# EAGLE board F20_NoMCU_PDM_V1_v1 (EAGLE 9.7.0)
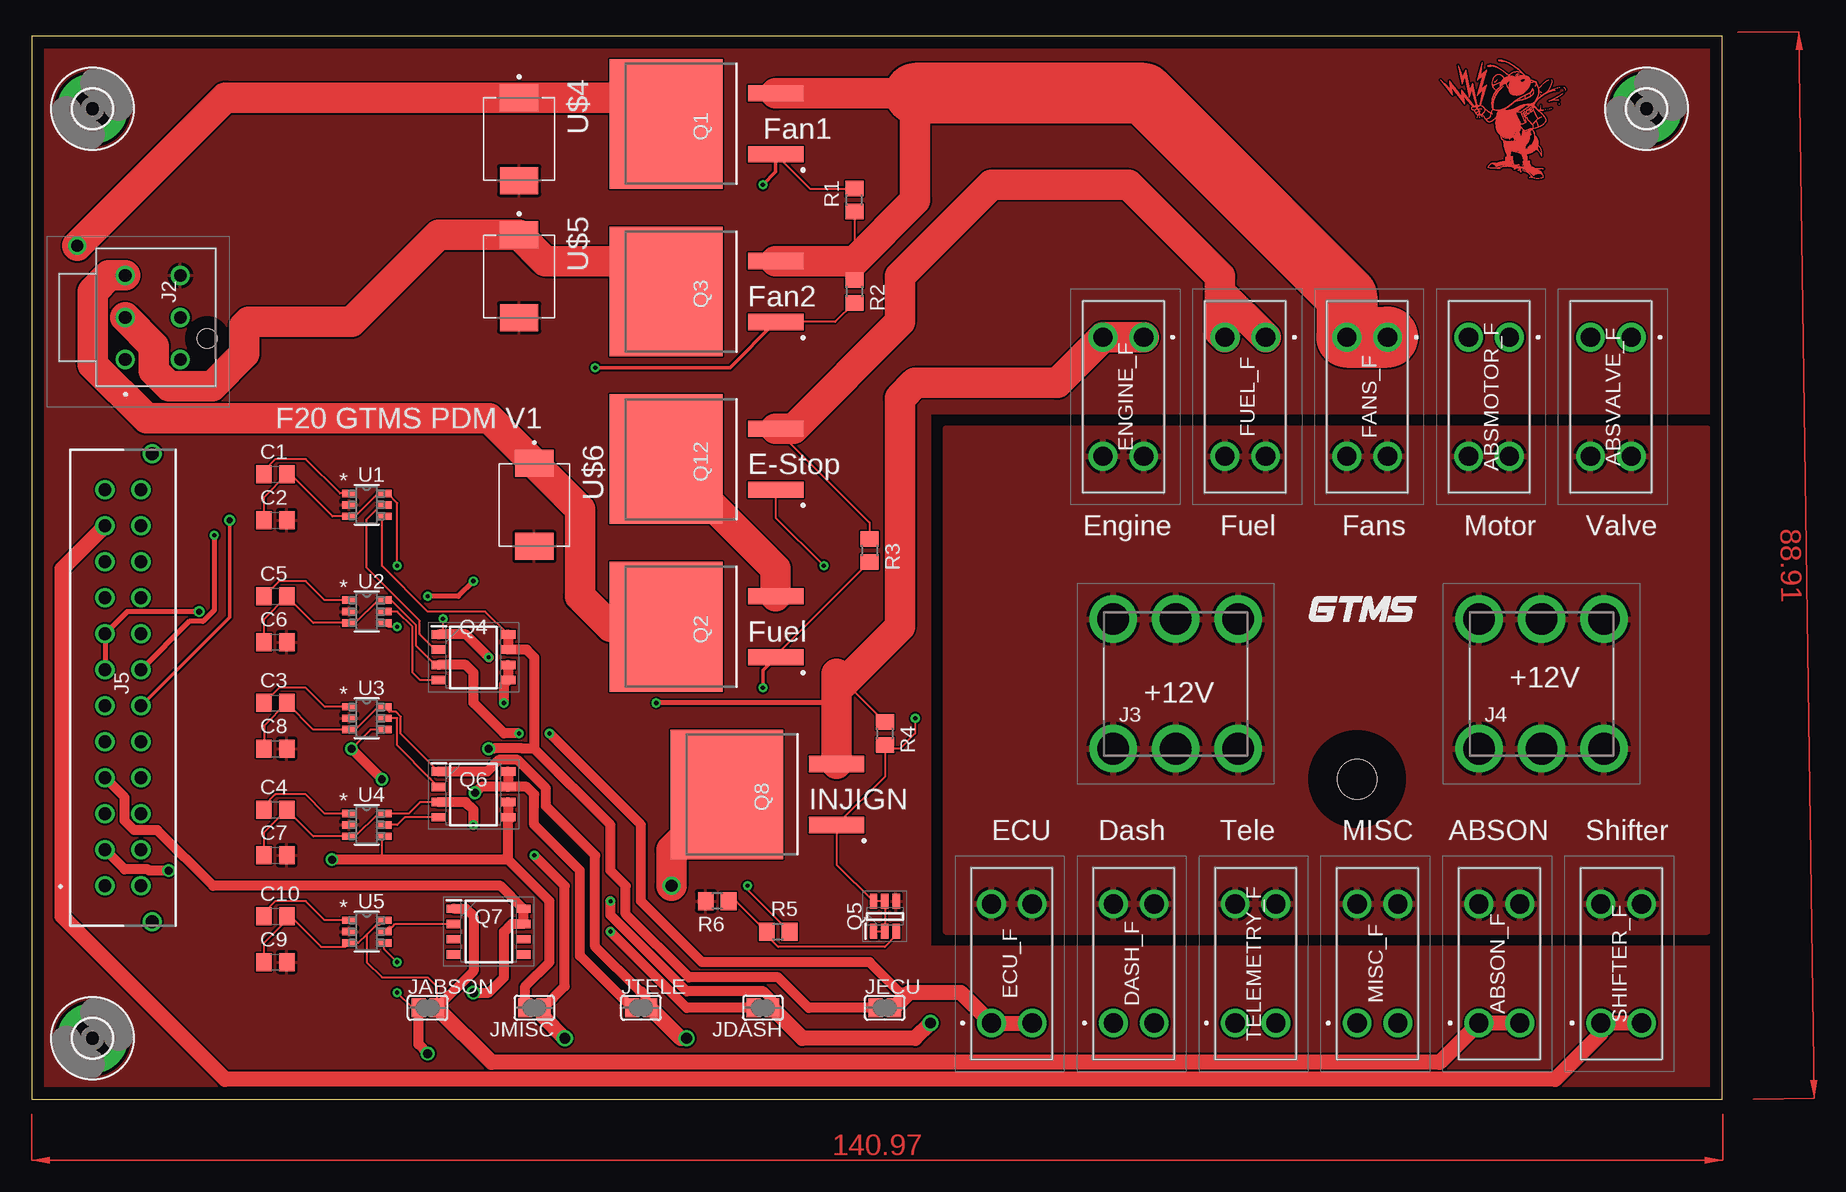
[diagram p0: board, top side]
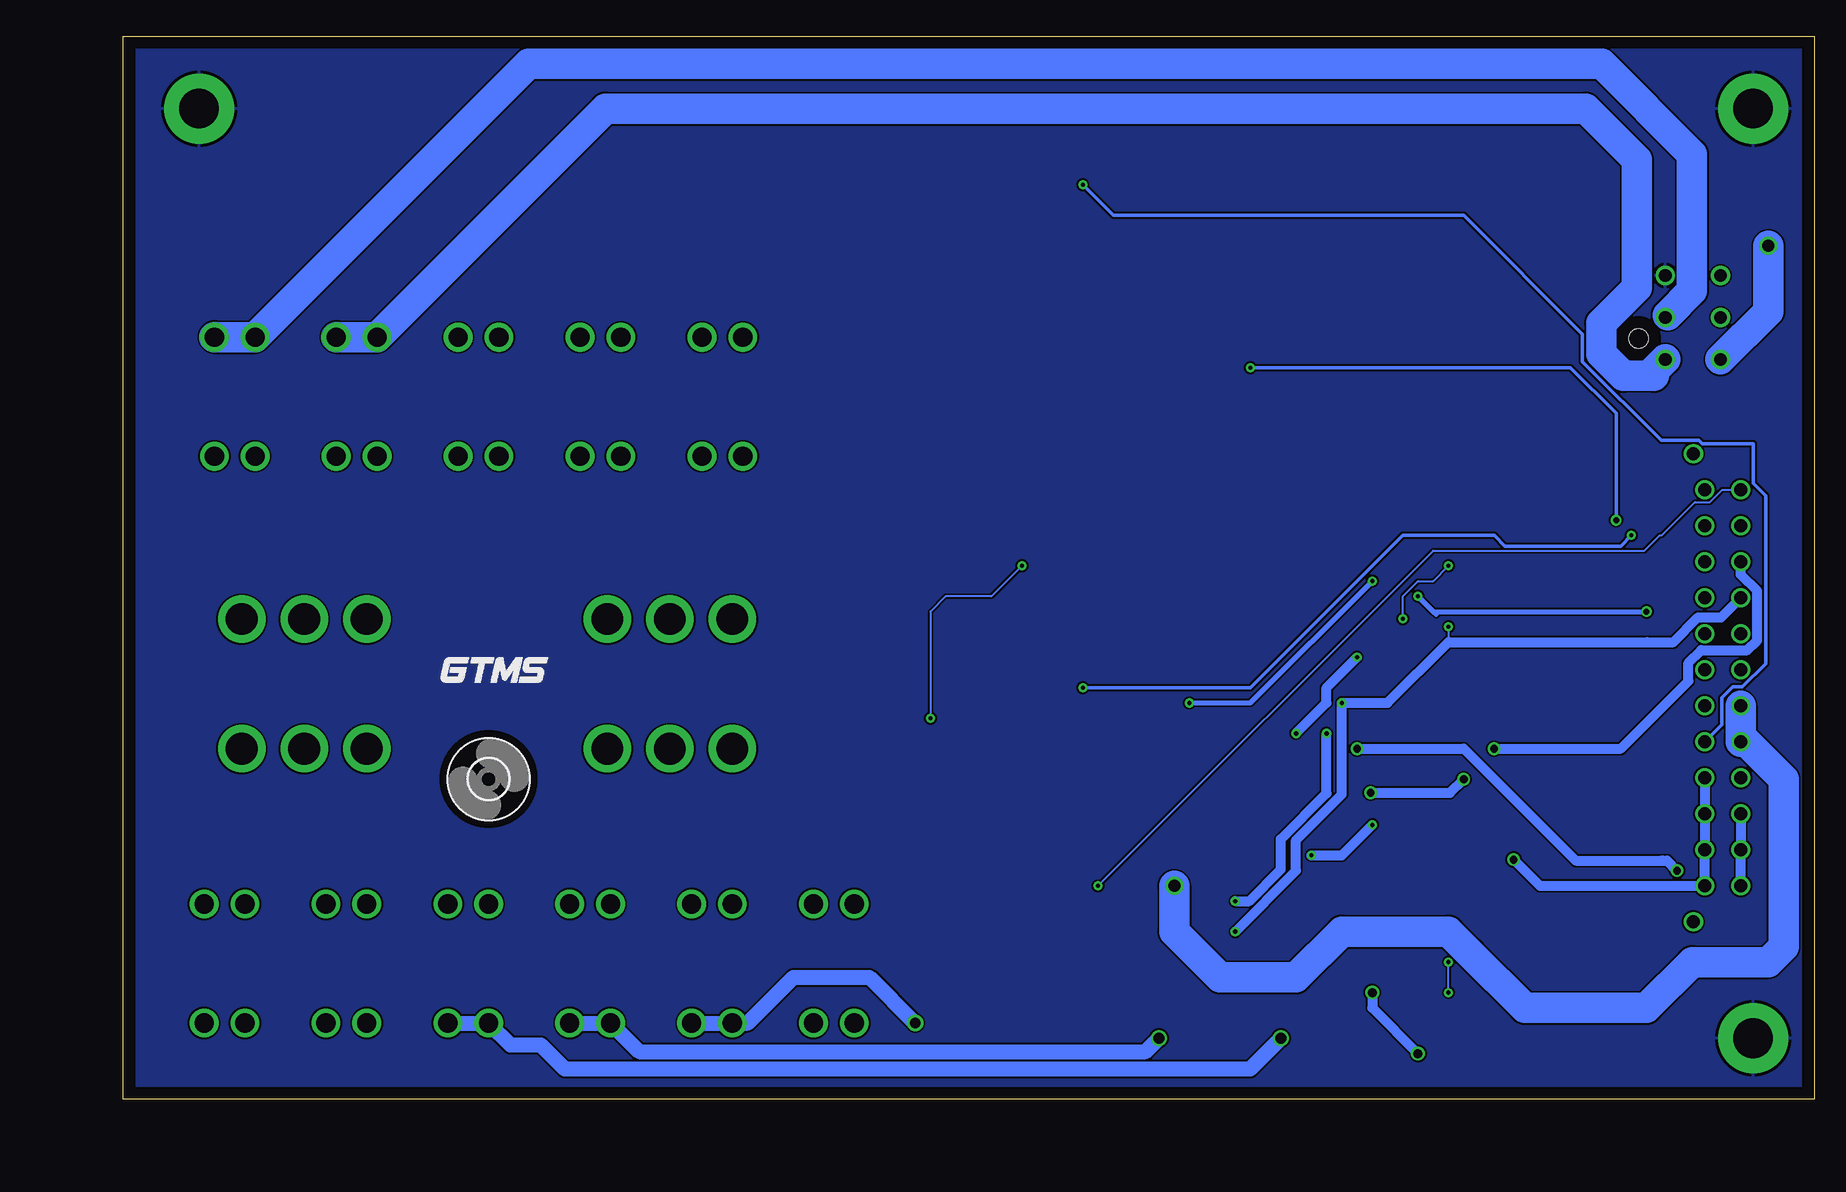
[diagram p1: board, bottom side, seen from below]

Size 140.95 x 88.57 mm. Coordinates in mm from the lower left corner, seen from the top.
Outline: 0,0 140.95,0 140.95,88.57 0,88.57 0,0
Copper layers (1*16): Top 0.035mm / dielectric 1.5mm / Bottom 0.035mm
Design rules "default": minimum track width 6mil, minimum drill 0.35mm, track to track 6mil, track to pad 6mil, pad to pad 6mil, via to via 6mil, smd to smd 6mil, copper to edge 40mil, drill to drill 6mil, minimum pad ring 10mil, minimum via ring 8mil, stop-mask expansion 4mil, vias tented up to drill 0mil, thermal gap 10mil

## Footprints (pad centres in the part's own frame; a part is rotated, then mirrored left to right if it is on the bottom)
3568 = drill 1.6 pad 2.4: 1 0,0; 2 0,-3.4; 3 9.92,0; 4 9.92,-3.4
C0805 = smd 1.3 x 1.5: 1 -0.95,0; 2 0.95,0
3,3-PAD = drill 3.3 pad 5.842: B3,3 0,0
3,3 = hole 3.3: 0,0
1722981106 = drill 1.06 pad 1.59: 1 -3.125,1.085; 2 0.375,1.085; 3 3.875,1.085; 4 -3.125,-3.515; 5 0.375,-3.515; 6 3.875,-3.515 | hole 1.64: -1.375,-5.745
8196 = drill 2.64 pad 3.96: 1 0,0; 2 0,10.8; 3 5.21,0; 4 5.21,10.8; 5 10.42,0; 6 10.42,10.8
43045-2412 = drill 1.07 pad 1.6: 1 16.5,-1.5; 2 13.5,-1.5; 3 10.5,-1.5; 4 7.5,-1.5; 5 4.5,-1.5; 6 1.5,-1.5; 7 -1.5,-1.5; 8 -4.5,-1.5; 9 -7.5,-1.5; 10 -10.5,-1.5; 11 -13.5,-1.5; 12 -16.5,-1.5; 13 16.5,1.5; 14 13.5,1.5; 15 10.5,1.5; 16 7.5,1.5; 17 4.5,1.5; 18 1.5,1.5; 19 -1.5,1.5; 20 -4.5,1.5; 21 -7.5,1.5; 22 -10.5,1.5; 23 -13.5,1.5; 24 -16.5,1.5; 25 -19.5,2.44; 26 19.5,2.44
SJ = smd 1.168 x 1.6: 1 -0.762,0; 2 0.762,0
PG-TO263-3-2_1 = smd 1.35 x 4.6: 1 -2.54,-12.5; 2 2.54,-12.5 | smd 10.8 x 9.4: 3 0,-3.35
SOIC127P605X105-8N = smd 1.212 x 0.7: 1 -2.894,1.905; 2 -2.894,0.635; 3 -2.894,-0.635; 4 -2.894,-1.905; 5 2.894,-1.905; 6 2.894,-0.635; 7 2.894,0.635; 8 2.894,1.905
SOT95P275X110-6N = smd 1.25 x 0.6: 1 -1.25,0.95; 2 -1.25,0; 3 -1.25,-0.95; 4 1.25,-0.95; 5 1.25,0; 6 1.25,0.95
R0805 = smd 1.3 x 1.5: 1 -0.95,0; 2 0.95,0
DBV6-M = smd 1.181 x 0.61: 1 -1.467,0.95; 2 -1.467,0; 3 -1.467,-0.95; 4 1.467,-0.95; 5 1.467,0; 6 1.467,0.95
DIOM7959X265N = smd 2.25 x 3.18: A 3.455,0; C -3.455,0

## Placement (x,y rotation side)
ABSMOTOR_F  3568  [3568]  123.19,63.5 270 top
ABSON_F  3568  [3568]  120.65,6.35 90 top
ABSVALVE_F  3568  [3568]  133.35,63.5 270 top
C1  1u  [C0805]  20.32,52.07 0 top
C2  10u 25V  [C0805]  20.32,48.26 0 top
C3  1u  [C0805]  20.32,33.02 0 top
C4  1u  [C0805]  20.32,24.13 0 top
C5  1u  [C0805]  20.32,41.91 0 top
C6  10u 25V  [C0805]  20.32,38.1 0 top
C7  10u 25V  [C0805]  20.32,20.32 0 top
C8  10u 25V  [C0805]  20.32,29.21 0 top
C9  10u 25V  [C0805]  20.32,11.43 0 top
C10  1u  [C0805]  20.32,15.24 0 top
DASH_F  3568  [3568]  90.17,6.35 90 top
ECU_F  3568  [3568]  80.01,6.35 90 top
ENGINE_F  3568  [3568]  92.71,63.5 270 top
FANS_F  3568  [3568]  113.03,63.5 270 top
FUEL_F  3568  [3568]  102.87,63.5 270 top
H1  MOUNT-PAD-ROUND3.3  [3,3-PAD]  5.08,5.08 0 top
H2  MOUNT-PAD-ROUND3.3  [3,3-PAD]  134.62,82.55 0 top
H3  MOUNT-PAD-ROUND3.3  [3,3-PAD]  5.08,82.55 0 top
H4  MOUNT-HOLE3.3  [3,3]  110.49,26.67 0 bottom
J2  1722981106  [1722981106]  8.89,64.77 90 top
J3  8196  [8196]  90.17,29.21 0 top
J4  8196  [8196]  120.65,29.21 0 top
J5  43045-2412  [43045-2412]  7.62,34.29 270 top
JABSON  [SJ]  33.02,7.62 0 top
JDASH  [SJ]  60.96,7.62 180 top
JECU  [SJ]  71.12,7.62 0 top
JMISC  [SJ]  41.91,7.62 180 top
JTELE  [SJ]  50.8,7.62 0 top
MISC_F  3568  [3568]  110.49,6.35 90 top
Q1  IPB120P04P4L03ATMA1  [PG-TO263-3-2_1]  49.53,81.28 90 top
Q2  IPB120P04P4L03ATMA1  [PG-TO263-3-2_1]  49.53,39.37 90 top
Q3  IPB120P04P4L03ATMA1  [PG-TO263-3-2_1]  49.53,67.31 90 top
Q4  BUK9K29-100E  [SOIC127P605X105-8N]  36.83,36.83 0 top
Q5  NSVT489AMT1G  [SOT95P275X110-6N]  71.12,15.24 90 top
Q6  BUK9K29-100E  [SOIC127P605X105-8N]  36.83,25.4 0 top
Q7  BUK9K29-100E  [SOIC127P605X105-8N]  38.1,13.97 0 top
Q8  IPB120P04P4L03ATMA1  [PG-TO263-3-2_1]  54.61,25.4 90 top
Q12  IPB120P04P4L03ATMA1  [PG-TO263-3-2_1]  49.53,53.34 90 top
R1  1k  [R0805]  68.58,74.93 90 top
R2  1k  [R0805]  68.58,67.31 270 top
R3  1k  [R0805]  69.85,45.72 270 top
R4  1k  [R0805]  71.12,30.48 270 top
R5  20k  [R0805]  62.23,13.97 0 top
R6  1k  [R0805]  57.15,16.51 180 top
SHIFTER_F  3568  [3568]  130.81,6.35 90 top
TELEMETRY_F  3568  [3568]  100.33,6.35 90 top
U1  LM74700QDBVTQ1DBV6-M  [DBV6-M]  27.94,49.53 0 top
U2  LM74700QDBVTQ1DBV6-M  [DBV6-M]  27.94,40.64 0 top
U3  LM74700QDBVTQ1DBV6-M  [DBV6-M]  27.94,31.75 0 top
U4  LM74700QDBVTQ1DBV6-M  [DBV6-M]  27.94,22.86 0 top
U5  LM74700QDBVTQ1DBV6-M  [DBV6-M]  27.94,13.97 0 top
U$1  GTMS  [GTMS]  110.49,40.64 0 top
U$2  ECE_BUZZ  [ECE_BUZZ]  123.19,81.28 0 top
U$3  GTMS  [GTMS]  110.49,35.56 0 bottom
U$4  S10AL-TP  [DIOM7959X265N]  40.64,80.01 270 top
U$5  S10AL-TP  [DIOM7959X265N]  40.64,68.58 270 top
U$6  S10AL-TP  [DIOM7959X265N]  41.91,49.53 270 top

## Library data of the parts
ABSMOTOR_F ABSON_F ABSVALVE_F DASH_F ECU_F ENGINE_F FANS_F FUEL_F MISC_F SHIFTER_F TELEMETRY_F = SamacSys_Parts; DESCRIPTION: Fuse Holder .63 MINI FUSE HOLDER; HEIGHT: 7.37mm; MANUFACTURER_NAME: Keystone Electronics; MANUFACTURER_PART_NUMBER: 3568; MOUSER_PART_NUMBER: 534-3568; MOUSER_PRICE-STOCK: https://www.mouser.com/Search/Refine.aspx?Keyword=534-3568
C1-C10 = rcl; SPICEPREFIX: C
H1-H4 = holes
J2 = Molex_1722981106; DESCRIPTION: ULTRAFIT CONN HDR 06CKT; HEIGHT: 14mm; MANUFACTURER_NAME: Molex; MANUFACTURER_PART_NUMBER: 1722981106
J3 J4 = 8196_ScrewTerminal; DESCRIPTION: Terminal; 10-32; Stainless Steel; 3/8 in.; 0.679 in.; 0.679 in.; Brass; Tin; HEIGHT: 11.51mm; MANUFACTURER_NAME: Keystone Electronics; MANUFACTURER_PART_NUMBER: 8196; MOUSER_PART_NUMBER: 534-8196; MOUSER_PRICE-STOCK: https://www.mouser.com/Search/Refine.aspx?Keyword=534-8196
J5 = Molex_0430452412; DESCRIPTION: Header 3.00mm, WTB, dual row, vert,24w Molex MICRO-FIT 3.0 Series, Series Number 43045, 3mm Pitch 24 Way 2 Row Shrouded Straight PCB Header, Through Hole; HEIGHT: mm; MANUFACTURER_NAME: Molex; MANUFACTURER_PART_NUMBER: 43045-2412; MOUSER_PART_NUMBER: 538-43045-2412; MOUSER_PRICE-STOCK: https://www.mouser.com/Search/Refine.aspx?Keyword=538-43045-2412
JABSON JDASH JECU JMISC JTELE = jumper
Q1-Q3 Q8 Q12 = IPB120P04P4L03ATMA1; DESCRIPTION: IPB120P04P4L03ATMA1 P-Channel MOSFET, 120 A, 40 V OptiMOS P, 3-Pin D2PAK Infineon; HEIGHT: mm; MANUFACTURER_NAME: Infineon; MANUFACTURER_PART_NUMBER: IPB120P04P4L03ATMA1; MOUSER_PART_NUMBER: 726-IPB120P04P4L03AT; MOUSER_PRICE-STOCK: https://www.mouser.com/Search/Refine.aspx?Keyword=726-IPB120P04P4L03AT
Q4 Q6 Q7 = BUK9K29-100E; DESCRIPTION: NPN/PNP high power double bipolar transistor in a SOT1205 (LFPAK56D) Surface Mounted Device (SMD) power plastic package; HEIGHT: 1.05mm; MANUFACTURER_NAME: Nexperia; MANUFACTURER_PART_NUMBER: PHPT610030NPKX; MOUSER2_PART_NUMBER: 771-PHPT610030NPKX; MOUSER2_PRICE-STOCK: https://www.mouser.com/Search/Refine.aspx?Keyword=771-PHPT610030NPKX
Q5 = NSVT489AMT1G; DESCRIPTION: NPN Bipolar Transistor, 2 A 30 V, 6-pin TSOP; HEIGHT: 1.1mm; MANUFACTURER_NAME: ON Semiconductor; MANUFACTURER_PART_NUMBER: NSVT489AMT1G; MOUSER_PART_NUMBER: 863-NSVT489AMT1G; MOUSER_PRICE-STOCK: https://www.mouser.com/Search/Refine.aspx?Keyword=863-NSVT489AMT1G
R1-R6 = rcl; SPICEPREFIX: R
U1-U5 = LM74700; COPYRIGHT: Copyright (C) 2016 Accelerated Designs. All rights reserved; MANUFACTURER_PART_NUMBER: LM74700QDBVTQ1; VENDOR: Texas Instruments
U$1-U$3 = art
U$4-U$6 = S10AL-TP

## Nets
+12V: ABSMOTOR_F.3 ABSMOTOR_F.4 ABSON_F.3 ABSON_F.4 ABSVALVE_F.3 ABSVALVE_F.4 DASH_F.3 DASH_F.4 ECU_F.3 ECU_F.4 ENGINE_F.3 ENGINE_F.4 FANS_F.3 FANS_F.4 FUEL_F.3 FUEL_F.4 J3.1 J3.2 J3.3 J3.4 J3.5 J3.6 J4.1 J4.2 J4.3 J4.4 J4.5 J4.6 MISC_F.3 MISC_F.4 SHIFTER_F.3 SHIFTER_F.4 TELEMETRY_F.3 TELEMETRY_F.4
ABSMOTOR_F: ABSMOTOR_F.1 ABSMOTOR_F.2 J2.4
ABSON+: J5.4 JABSON.1 Q7.7 Q7.8 U5.4
ABSVALVE_F: ABSVALVE_F.1 ABSVALVE_F.2 J2.5
DASH+: J5.9 JDASH.2 Q4.5 Q4.6 U2.4
ECU+: J5.1 J5.2 J5.3 JECU.1 Q4.7 Q4.8 U1.4
ENGINE_F: ENGINE_F.1 ENGINE_F.2 J5.7 J5.8 Q8.2 R4.1
ESTOP_IN: J5.12 R5.2
FAN1+: J2.1 Q1.3 U$4.C
FAN1SIG: J5.17 Q1.1 R1.2
FAN2+: J2.2 Q3.3 U$5.C
FAN2SIG: J5.18 Q3.1 R2.2
FUEL+: J2.3 Q2.3 U$6.C
FUELSIG: J5.19 Q2.1 R3.2
GND: C2.2 C6.2 C7.2 C8.2 C9.2 H1.B3,3 H2.B3,3 H3.B3,3 J2.6 Q5.4 R6.2 U1.2 U2.2 U3.2 U4.2 U5.2 U$4.A U$5.A U$6.A
INJIGN+: J5.5 J5.6 Q8.3
MISC+: J5.13 J5.14 J5.15 J5.16 JMISC.2 Q6.5 Q6.6 U4.4
N$1: FANS_F.1 FANS_F.2 Q1.2 Q3.2 R1.1 R2.1
N$2: FUEL_F.1 FUEL_F.2 Q12.2 R3.1
N$3: Q2.2 Q12.3
N$4: C1.2 C2.1 ECU_F.1 ECU_F.2 JECU.2 Q4.1 U1.3 U1.6
N$5: Q5.3 R5.1 R6.1
N$6: C1.1 U1.1
N$7: Q5.1 Q5.2 Q5.5 Q5.6 Q8.1 Q12.1 R4.2
N$8: C5.1 U2.1
N$9: C5.2 C6.1 DASH_F.1 DASH_F.2 JDASH.1 Q4.3 U2.3 U2.6
N$11: ABSON_F.1 ABSON_F.2 C9.1 C10.2 JABSON.2 Q7.1 U5.3 U5.6
N$12: Q4.2 U1.5
N$14: C10.1 U5.1
N$15: Q4.4 U2.5
N$16: C3.1 U3.1
N$19: C4.1 U4.1
N$20: Q7.2 U5.5
N$22: C4.2 C7.1 JMISC.1 MISC_F.1 MISC_F.2 Q6.3 U4.3 U4.6
N$23: C3.2 C8.1 JTELE.2 Q6.1 TELEMETRY_F.1 TELEMETRY_F.2 U3.3 U3.6
N$28: Q6.2 U3.5
N$30: Q6.4 U4.5
SHIFTER_F: J5.11 SHIFTER_F.1 SHIFTER_F.2
TELE+: J5.10 JTELE.1 Q6.7 Q6.8 U3.4

## Tracks (layer width: path | path; a pad name or v marks a point on that pad's centre or on a via)
+12V
  pour Top: 76.2,13.97 139.7,13.97 139.7,55.88 76.2,55.88
ABSMOTOR_F
  Bottom 2.54: ABSMOTOR_F.1 ABSMOTOR_F.2 100.74,82.55 19.05,82.55 14.78,78.28 14.78,67.64 17.74,64.68 17.74,62.11 15.92,60.29 13.35,60.29 13.35,60.7 J2.4
ABSON+  (via drill 0.35, 0.75)
  Top 0.152: JABSON.1 31.75,7.62 v30.48,8.89 | v30.48,11.43 29.41,12.5 U5.4
  Top 0.813: v33.02,3.81 32.26,4.57 JABSON.1 | v36.83,8.89 38.1,8.89 39.37,10.16 39.37,13.97 40.01,14.61 Q7.7 Q7.8 39.09,17.78 15.13,17.78 10.48,22.43 8.56,22.43 7.76,23.23 7.76,25.15 J5.4
  Bottom 0.152: v30.48,8.89 v30.48,11.43
  Bottom 0.813: v36.83,8.89 36.83,7.62 v33.02,3.81
ABSVALVE_F
  Bottom 1.016: 12.2,65.35 J2.5
  Bottom 2.54: ABSVALVE_F.1 ABSVALVE_F.2 107.17,86.28 17.7,86.28 10.19,78.77 10.19,67.36 12.2,65.35
DASH+  (via drill 0.35)
  Top 0.152: U2.4 29.73,39.37 v30.48,39.37
  Top 0.813: JDASH.2 54.61,7.62 v48.26,13.97 | v39.37,33.02 39.37,34.57 Q4.5 Q4.6
  Bottom 0.152: v30.48,39.37 30.48,38.1
  Bottom 0.813: v48.26,13.97 43.18,19.05 43.18,21.59 39.37,25.4 v39.37,33.02 35.56,33.02 30.48,38.1 13.95,38.1 11.73,38.1 9.68,40.15 7.76,40.15 J5.9
ECU+  (via drill 0.65)
  Top 0.152: Q4.8 37.82,40.64 33.02,40.64 29.21,44.45 29.21,48.38 U1.4
  Top 0.813: JECU.1 64.77,7.62 62.23,10.16 54.8,10.16 49.53,15.43 49.53,17.78 48.26,19.05 48.26,22.86 41.91,29.21 | 41.91,29.21 41.91,36.83 41.27,37.47 Q4.7 Q4.8 | 41.91,29.21 40.93,29.21 40.91,29.23 38.54,29.23 38.52,29.21 v38.1,29.21 | v11.43,19.05 9.79,19.05 9.68,19.15 7.76,19.15 J5.2
  Bottom 0.813: v38.1,29.21 29.21,29.21 19.88,19.88 12.7,19.88 12.6,19.88 12.26,19.88 v11.43,19.05 | J5.1 J5.2 J5.3
ENGINE_F  (via drill 0.35, 0.5)
  Top 0.152: R4.1 67.11,35.44
  Top 0.406: 67.11,34.09 66.04,33.02 v52.07,33.02 | v36.83,43.18 35.56,41.91 v33.02,41.91 | v13.97,40.64 9.61,40.64 9.6,40.63 7.96,40.63 J5.8 J5.7
  Top 2.54: ENGINE_F.1 ENGINE_F.2 85.5,59.69 73.66,59.69 72.39,58.42 72.39,39.37 67.11,34.09 | 67.11,35.44 67.11,34.09 | 67.11,34.09 Q8.2
  Bottom 0.406: v52.07,33.02 46.99,33.02 v36.83,43.18 | v33.02,41.91 31.75,40.64 | 31.75,40.64 31.51,40.4 | 31.75,40.64 v13.97,40.64
ESTOP_IN  (via drill 0.35)
  Top 0.152: R5.2 59.69,17.46 v59.69,17.78
  Bottom 0.152: v59.69,17.78 31.75,45.72 14.14,45.72 14.05,45.8 13.59,46.27 12.87,46.99 12.7,46.99 9.93,49.76 8.69,49.76 7.66,50.79 J5.12
FAN1+  (via drill 1)
  Top 2.54: v3.81,71.12 16.16,83.47 U$4.C 50.7,83.47 Q1.3
  Bottom 2.54: v3.81,71.12 3.81,65.64 J2.1
FAN1SIG  (via drill 0.35)
  Top 0.152: Q1.1 64.89,75.88 R1.2
  Top 0.305: Q1.1 62.03,77.27 v60.96,76.2
  Bottom 0.305: J5.17 7.7,31.21 7.7,33.44 6.77,34.37 5.98,34.37 4.05,36.3 4.05,50.28 5.08,51.32 5.08,54.61 9.31,54.61 9.6,54.9 12.76,54.9 19.32,61.46 19.32,63.77 29.21,73.66 58.42,73.66 v60.96,76.2
FAN2+
  Top 2.54: 52.39,66.82 Q3.3 50.34,69.85 42.83,69.85 U$5.C 33.94,72.03 26.67,64.77 18.09,64.77 17.74,64.42 17.74,62.11 15.06,59.43 11.49,59.43 10.19,60.73 10.19,62.76 J2.2
FAN2SIG  (via drill 0.35, 0.5)
  Top 0.152: R2.2 66.99,64.77 Q3.1
  Top 0.305: Q3.1 58.22,60.96 v46.99,60.96 | v16.51,48.26 16.51,40.18 J5.18
  Bottom 0.305: v46.99,60.96 20.32,60.96 16.51,57.15 v16.51,48.26
FUEL+
  Top 2.54: J2.3 6.42,68.64 5.08,67.31 5.11,67.28 5.11,61.2 9.58,56.73 38.16,56.73 U$6.C 45.72,49.17 45.72,41.91 48.26,39.37 Q2.3
FUELSIG  (via drill 0.35)
  Top 0.152: R3.2 62.03,36.95 Q2.1
  Top 0.305: Q2.1 60.96,35.76 v60.96,34.29
  Top 0.406: J5.19 13.16,39.83 14.3,39.83 15.24,40.77 v15.24,46.99
  Bottom 0.305: v60.96,34.29 46.99,34.29 34.29,46.99 26.67,46.99 25.78,46.1 16.13,46.1 v15.24,46.99
GND
  pour Top: 140.97,0 140.97,12.7 74.99,12.7 74.96,12.71 74.94,12.73 74.93,12.76 74.93,57.09 74.94,57.12 74.96,57.14 74.99,57.15 140.97,57.15 140.97,88.9 0,88.9 0,0
  pour Bottom: 0,0 140.97,0 140.97,88.9 0,88.9
INJIGN+  (via drill 1)
  Top 2.54: Q8.3 53.34,20.78 v53.34,17.78
  Bottom 2.54: v53.34,17.78 53.34,13.97 49.53,10.16 43.18,10.16 39.37,13.97 30.47,13.97 28.68,12.18 28.68,12.17 24.13,7.62 13.97,7.62 10.16,11.43 3.81,11.43 2.54,12.7 2.54,26.67 5.66,29.79 | 5.66,29.79 J5.5 | J5.6 6.12,30.25 5.66,29.79
MISC+  (via drill 0.65)
  Top 0.152: 29.21,19.97 29.21,21.71 U4.4
  Top 0.813: Q6.5 39.88,23.34 | Q6.6 Q6.5 | JMISC.2 41.15,9.4 43.18,11.43 43.18,16.51 39.72,19.97 | 39.72,19.97 Q6.5 | 39.72,19.97 29.21,19.97 v25.05,19.97
  Bottom 0.813: J5.16 J5.15 J5.14 J5.13 22.86,17.78 v25.05,19.97
N$1
  Top 0.152: R1.1 68.58,69.85 R2.1
  Top 2.54: Q3.2 68.58,69.85 73.66,74.93 73.66,83.82 Q1.2
  Top 5.08: 73.66,83.82 92.71,83.82 109.63,66.9 FANS_F.2 FANS_F.1
N$2
  Top 0.152: Q12.2 69.85,48.06 R3.1
  Top 2.54: FUEL_F.2 99.06,63.91 99.06,67.31 | FUEL_F.1 99.06,67.31 | 99.06,67.31 99.06,68.58 91.44,76.2 80.01,76.2 72.39,68.58 72.39,64.77 63.5,55.88 Q12.2
N$3
  Top 2.54: Q12.3 62.03,44.19 Q2.2
N$4  (via drill 0.35)
  Top 0.152: Q4.1 34.29,39.09 v34.29,40.03 | v30.48,44.45 30.48,49.67 29.68,50.48 U1.6 28.89,50.48 26.99,48.58 U1.3 25.08,48.58 21.59,52.07 C1.2 19.37,50.17 C2.1
  Top 0.813: 73.15,8.89 72.39,8.89 69.85,11.43 55.88,11.43 50.8,16.51 50.8,22.86 v43.18,30.48 | Q4.1 36.2,38.73 v38.1,36.83
  Top 1.27: ECU_F.2 ECU_F.1 77.47,8.89 73.15,8.89 JECU.2
  Bottom 0.152: v34.29,40.03 34.29,41.91 33.02,43.18 31.75,43.18 v30.48,44.45
  Bottom 0.813: v43.18,30.48 40.64,33.02 40.64,34.29 v38.1,36.83
N$5
  Top 0.152: Q5.3 72.07,13.65 71.12,12.7 62.23,12.7 61.28,13.65 R5.1 58.74,16.51 R6.1
N$6
  Top 0.152: U1.1 25.72,50.48 22.86,53.34 20.32,53.34 19.37,52.39 C1.1
N$7  (via drill 0.35)
  Top 0.152: Q12.1 62.03,48.46 v66.04,44.45 | 71.44,29.53 R4.2 71.12,29.21 | 71.12,29.21 71.12,26.87 Q8.1 67.11,19.55 Q5.6 Q5.5 Q5.2 Q5.1 | v73.66,31.75 73.66,30.48 72.39,29.21 71.12,29.21
  Bottom 0.152: v66.04,44.45 68.58,41.91 72.39,41.91 73.66,40.64 v73.66,31.75
N$8
  Top 0.152: U2.1 24.45,41.59 22.86,43.18 20.64,43.18 C5.1
N$9  (via drill 0.35, 0.9)
  Top 0.152: Q4.3 33.66,36.2 32.05,37.8 32.05,39.5 29.96,41.59 U2.6 28.89,41.59 26.99,39.69 U2.3 23.49,39.69 C5.2 19.37,40.01 C6.1
  Top 0.813: JDASH.1 61.72,8.27 61.01,8.98 54.62,8.98 48.26,15.34 v48.26,16.51 | v40.64,30.48 39.37,30.48 36.83,33.02 36.83,35.56 36.2,36.2 Q4.3
  Top 1.27: v74.93,6.35 73.66,5.08 64.26,5.08 JDASH.1
  Bottom 0.813: v48.26,16.51 47.09,16.51 44.45,19.14 44.45,21.68 40.64,25.5 v40.64,30.48
  Bottom 1.27: v74.93,6.35 78.74,10.16 85.09,10.16 88.9,6.35 DASH_F.1 DASH_F.2
N$11
  Top 0.152: 27.94,13.72 27.24,13.02 U5.3 26.15,12.7 24.13,12.7 21.59,15.24 | C10.2 21.59,15.24 | C9.1 19.37,13.02 21.59,15.24 | U5.6 28.99,14.5 28.72,14.5 27.94,13.72 | 27.94,13.72 27.94,11.43 29.21,10.16 33.02,10.16 33.78,9.4 JABSON.2
  Top 0.813: Q7.1 36.2,15.88 36.83,15.24 36.83,10.67 JABSON.2
  Top 1.27: ABSON_F.2 ABSON_F.1 117.37,3.07 38.33,3.07 JABSON.2
N$12
  Top 0.152: Q4.2 33.66,37.47 32.36,38.76 32.36,39.86 27.94,44.27 27.94,48.33 29.14,49.53 U1.5
N$14
  Top 0.152: U5.1 24.45,14.92 22.86,16.51 20.32,16.51 19.37,15.56 C10.1
N$15
  Top 0.152: Q4.4 32.38,34.92 31.75,35.56 31.75,39.37 30.48,40.64 U2.5
N$16
  Top 0.152: U3.1 24.45,32.7 22.86,34.29 20.64,34.29 C3.1
N$19
  Top 0.152: U4.1 24.45,23.81 22.86,25.4 20.32,25.4 19.37,24.45 C4.1
N$20
  Top 0.152: U5.5 29.82,14.39 30.09,14.39 30.31,14.61 Q7.2
N$22  (via drill 0.35, 0.9)
  Top 0.152: C7.1 19.37,22.23 C4.2 23.49,21.91 U4.3 26.99,21.91 28.89,23.81 U4.6 31.43,23.81 32.38,24.77 Q6.3
  Top 0.813: JMISC.1 44.45,9.4 44.45,17.78 v41.91,20.32 | v36.83,22.86 36.83,24.13 36.2,24.77 Q6.3
  Top 1.27: v44.45,5.08 42.67,6.86 JMISC.1
  Bottom 0.813: v41.91,20.32 39.37,20.32 v36.83,22.86
  Bottom 1.27: v44.45,5.08 46.99,2.54 104.14,2.54 106.14,4.54 108.68,4.54 MISC_F.1 MISC_F.2
N$23  (via drill 0.9)
  Top 0.152: Q6.1 30.79,30.46 30.79,31.88 30.38,32.28 29.82,32.28 U3.6 28.89,32.7 26.99,30.8 U3.3 23.49,30.8 C3.2 19.37,31.12 C8.1
  Top 0.813: JTELE.2 51.18,8 51.18,8.65 50.85,8.98 50.71,8.98 46.99,12.7 46.99,20.32 42.88,24.43 42.88,25.9 40.51,28.27 38.94,28.27 37.98,27.3 Q6.1
  Top 1.27: v54.61,5.08 54.1,5.08 JTELE.2
  Bottom 1.27: TELEMETRY_F.2 TELEMETRY_F.1 97.94,3.96 55.73,3.96 v54.61,5.08
N$28
  Top 0.152: Q6.2 33.24,26.73 33.23,26.73 30.48,29.48 30.48,31.75 U3.5
N$30
  Top 0.152: Q6.4 31.11,23.5 30.48,22.86 U4.5
SHIFTER_F
  Top 1.27: SHIFTER_F.2 SHIFTER_F.1 130.81,5.46 127,1.65 16.13,1.65 2.54,15.24 2.54,44.21 J5.11
TELE+  (via drill 0.65)
  Top 0.152: U3.4 28.26,30.8 v26.67,29.21
  Top 0.813: Q6.8 Q6.7 | JTELE.1 45.72,11.94 45.72,19.05 41.91,22.86 41.91,25.4 41.27,26.04 Q6.7 | Q6.7 37.47,26.04 v36.96,25.53 | v29.21,26.67 v26.67,29.21
  Bottom 0.813: v36.96,25.53 30.35,25.53 v29.21,26.67 | v26.67,29.21 16.11,29.21 10.48,34.84 10.48,36.35 9.41,37.43 5.56,37.43 4.76,38.23 4.76,42.35 6.12,43.72 J5.10
(copper drawn outside any net)
  shapes: Top area x2

## Text on the board
tNames: Fan1 | Fan2 | F20 GTMS PDM V1 | E-Stop | Engine | Fuel | Fans | Motor | Valve | Fuel | +12V | +12V | INJIGN | ECU | Dash | Tele | MISC | ABSON | Shifter